# Altium PCB 20K Control Board V1.1.PcbDoc (part 17 of 24)
Units mm, origin at the board's own origin, x right, y up, seen from the top; angles counter-clockwise.
Board outline 132 x 260 mm, 4 copper layers (Top Layer, GND, VCC, Bottom Layer); 1384 components, 779 nets, 4515 pads, 1774 vias.
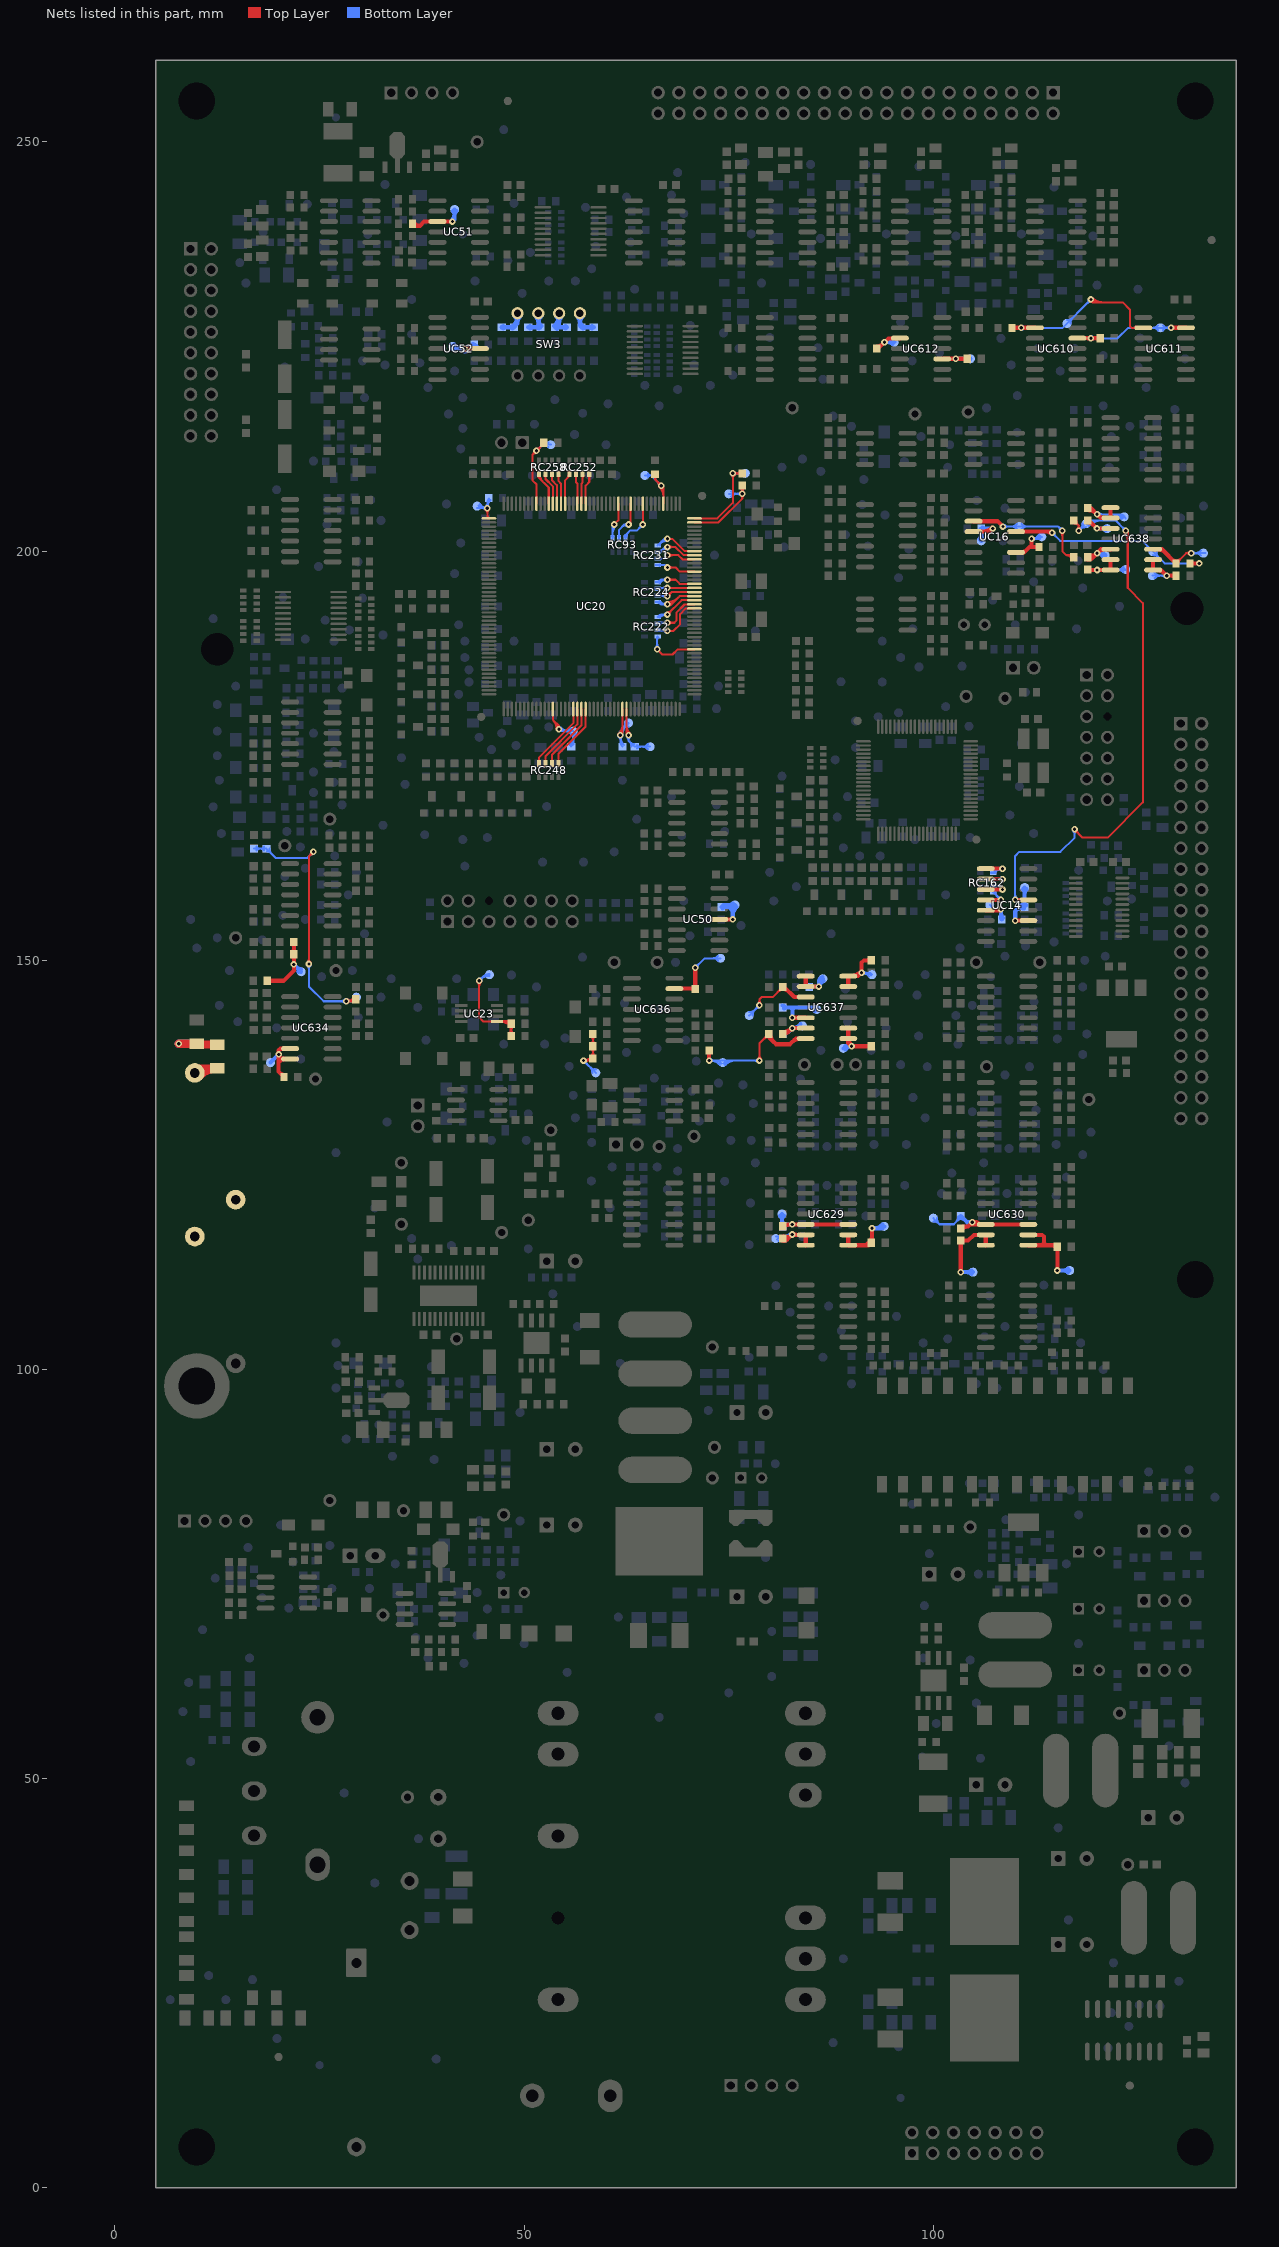
[diagram p19: the nets of this part, all layers, seen from the top]

## Via types
v1: diameter 0.8, hole 0.4, Top Layer to Bottom Layer, tented both sides, 1354 vias
v2: diameter 1.2, hole 0.7, Top Layer to Bottom Layer, 261 vias
v3: diameter 0.8, hole 0.4, Top Layer to Bottom Layer, 58 vias
v4: diameter 1.2, hole 0.7, Top Layer to Bottom Layer, tented top, 58 vias
v5: diameter 0.8, hole 0.4, Top Layer to Bottom Layer, tented top, 22 vias
v6: diameter 1.2, hole 0.7, Top Layer to Bottom Layer, tented both sides, 13 vias
v7: diameter 1.2, hole 0.7, Top Layer to Bottom Layer, tented bottom, 8 vias

## Nets (pads, with @x,y where several pads share a name; then routed paths per layer and width w, separated by ;. In a path a pad name is that pad's centre, name@x,y a point inside that pad or via, vN(x,y) a via of type N, cw(c..) or ccw(c..) an arc to the next point about the centre after c; other vN are vias at no path point) (continued)
NetRC27_1: pad.ICT@41.5,241.75 RC27.1 UC51.3 | length 9.7
  Top Layer w0.5: RC27.1@36.35,239.75 37.25,239.75 ; RC27.1@36.498,240.084 ccw(c37.25,240.762) 37.25,239.75 ; v1(41.23,240.27) UC51.3@39.4,240.27 37.77,240.27 37.25,239.75
  Bottom Layer w0.5: v1@41.124,240.376 ccw(c40.216,241.284) pad.ICT@41.5,241.284 ; v1(41.23,240.27) 41.5,240.54 pad.ICT@41.5,241.75 ; pad.ICT@41.288,241.538 cw(c40.776,241.026) 41.5,241.026 cw(c42.224,241.026) pad.ICT@41.712,241.538
NetRC28_1: pad.ICT@41.25,225 RC28.1 UC52.11 | length 9.7
  Top Layer w0.5: v1(42.75,224.75) UC52.11@44.6,224.75
  Bottom Layer w0.5: pad.ICT@41.25,225 41.5,224.75 v1(42.75,224.75) ; pad.ICT@41.462,225.212 ccw(c42.578,226.328) v1@42.578,224.75 ; v1@42.688,224.406 ccw(c42.795,225.002) 43.223,224.573 ; v1@42.777,224.898 ccw(c43.001,226.149) RC28.1@43.9,225.25 43.4,224.75 v1(42.75,224.75) ; 43.635,224.75 ccw(c43.635,225.36) RC28.1@44.157,225.045 ; RC28.1@43.729,225.303 cw(c42.75,225.892) v1(42.75,224.75)
NetRC36_1: pad.ICT@104.525,223.5 RC36.1 UC612.10 | length 6.5
  Top Layer w0.5: UC612.10@101.12,223.5 v1(102.75,223.5) RC36.1@103.9,223.5 ; RC36.1@104.009,223.359 ccw(c103.667,223.017) 103.667,223.5 ccw(c103.667,223.983) RC36.1@104.009,223.641
  Bottom Layer w0.5: v1(102.75,223.5) pad.ICT@104.525,223.5 ; pad.ICT@104.313,223.288 ccw(c103.801,222.776) 103.801,223.5 ccw(c103.801,224.224) pad.ICT@104.313,223.712
NetRC40_1: pad.ICT@95.22,225.53 RC40.1 UC612.3 | length 6.4
  Top Layer w0.5: RC40.1@93.1,224.75 93.25,224.75 94.5,226 UC612.3@95.88,226 ; RC40.1@93.1,225 ccw(c93.1,225.966) v1@93.783,225.283
  Bottom Layer w0.5: v1(94.03,225.53) pad.ICT@95.22,225.53 ; pad.ICT@95.008,225.318 ccw(c94.496,224.806) 94.496,225.53 ccw(c94.496,226.254) pad.ICT@95.008,225.742
NetRC43_2: pad.ICT@75.75,156.75 RC43.2 UC50.11 | length 15.2
  Top Layer w0.5: UC50.11@73.85,155 v1(75.48,155)
  Bottom Layer w0.5: RC43.2@74.241,156.359 cw(c74.583,156.017) 74.583,156.5 cw(c74.583,156.983) RC43.2@74.241,156.641 ; RC43.2@74.241,156.409 cw(c75.066,155.584) 75.066,156.75 ; RC43.2@74.422,156.5 ccw(c74.422,158.078) 75.538,156.962 cw(c75.026,157.474) 75.026,156.75 cw(c75.026,156.026) pad.ICT@75.538,156.538 ; 74.882,156.618 ccw(c75.392,157.127) pad.ICT@75.888,156.605 ; pad.ICT@75.464,156.84 cw(c75,156.986) 75,156.5 ; v1(75.48,155) 75.48,156.02 ; v1@75.48,155.374 cw(c77.126,155.374) pad.ICT@75.962,156.538 ; 75,156.5 75.48,156.02 ; 75,156.5 RC43.2@74.1,156.5 74.35,156.75 pad.ICT@75.75,156.75 75.48,156.48 75.48,156.02 ; 75.48,155.972 cw(c75.996,155.972) 75.841,156.464 ccw(c75.996,155.972) 75.48,155.972
NetRC60_1: pad.ICT@22.75,148.6 RC60.1 RC507.2 RC707.2 | length 12.7
  Top Layer w0.5: RC707.2@18.6,147.5 20.6,147.5 21.85,148.75 RC60.1@21.85,152.25 ; RC707.2@18.741,147.359 cw(c19.083,147.017) 19.083,147.5 cw(c19.083,147.983) RC707.2@18.741,147.641 ; RC507.2@21.709,150.559 cw(c21.367,150.217) 21.85,150.217 cw(c22.333,150.217) RC507.2@21.991,150.559 ; RC507.2@21.709,150.941 ccw(c21.367,151.283) 21.85,151.283 ccw(c22.333,151.283) RC507.2@21.991,150.941 ; RC60.1@21.709,152.059 cw(c21.367,151.717) 21.85,151.717 cw(c22.333,151.717) RC60.1@21.991,152.059
  Bottom Layer w0.5: v1(21.85,149.5) pad.ICT@22.75,148.6 ; pad.ICT@22.45,148.6 ccw(c21.726,148.6) 22.238,149.112 ccw(c22.75,149.624) pad.ICT@22.75,148.9
NetRC65_1: pad.ICT@94,117.5 RC65.1 UC629.8 UC629.9 | length 10.6
  Top Layer w0.5: UC629.9@89.6,116.46 UC629.8@89.6,115.19 92.09,115.19 RC65.1@92.4,115.5 92.5,115.6 v1(92.5,117.25) ; 91.289,115.19 ccw(c91.289,116.561) RC65.1@92.259,115.591 ; RC65.1@92.259,115.691 ccw(c91.676,116.274) 92.5,116.274
  Bottom Layer w0.5: v1(92.5,117.25) 93.75,117.25 pad.ICT@94,117.5 ; v1@92.672,117.25 ccw(c92.672,118.828) pad.ICT@93.788,117.712
NetRC68_2: pad.ICT@81.5,119 RC68.2 RC70.1 UC629.5 UC629.10 | length 14.2
  Top Layer w0.5: RC70.1@81.6,117.5 81.83,117.73 v1(82.75,117.73) UC629.5@84.4,117.73 UC629.10@89.6,117.73 ; RC70.1@81.741,117.409 cw(c82.517,116.633) v1@82.517,117.73
  Bottom Layer w0.5: pad.ICT@81.288,118.788 cw(c80.776,118.276) 81.5,118.276 cw(c82.224,118.276) pad.ICT@81.712,118.788 ; RC68.2@81.5,117.6 pad.ICT@81.5,119 ; 81.5,118.274 ccw(c82.324,118.274) RC68.2@81.741,117.691 ; RC68.2@81.6,117.5 81.83,117.73 v1(82.75,117.73) ; RC68.2@81.741,117.409 cw(c82.517,116.633) v1@82.517,117.73
NetRC72_1: pad.ICT@80.75,116 RC72.1 UC629.6 UC629.7 | length 13.7
  Top Layer w0.5: RC72.1@81.494,115.77 ccw(c81.717,116.359) 82.163,115.913 ; RC72.1@81.6,116 82.25,116 v1@82.71,116.46 ; RC72.1@81.671,116.237 ccw(c82.018,117.152) v1@82.71,116.46 ; RC72.1@81.741,115.859 cw(c82.083,115.517) 82.083,116 cw(c82.083,116.483) RC72.1@81.741,116.141 ; v1@82.856,116.606 ccw(c83.209,116.959) 83.209,116.46 ; UC629.7@84.4,115.19 UC629.6@84.4,116.46 v1@82.71,116.46
  Bottom Layer w0.25: pad.ICT@80.75,116.25 82.5,116.25 v1@82.71,116.46 ; pad.ICT@80.874,115.876 cw(c81.776,114.974) 81.776,116.25 ; pad.ICT@81.051,115.699 cw(c82.38,114.37) 82.38,116.25 ; 81.483,116.25 ccw(c81.483,117.767) v1@82.556,116.694 ; 82.086,116.25 ccw(c82.086,117.164) v1@82.732,116.518
  other v1: 82.75,116.5
NetRC79_1: pad.ICT@29.5,145.5 RC79.1 RC506.2 RC709.2 | length 45.3
  Top Layer w0.25: v1@23.506,149.744 ccw(c23.036,150.214) 23.7,150.214 ccw(c24.364,150.214) v1@23.894,149.744 ; v1(23.7,149.55) 23.7,162.7 v1(24.25,163.25) ; v1@23.975,163.25 cw(c23.311,163.25) 23.781,162.781 cw(c24.25,162.311) v1@24.25,162.975 ; v1@28.444,144.806 cw(c28.914,144.336) 28.914,145 cw(c28.914,145.664) v1@28.444,145.194 ; 28.798,145 ccw(c28.798,145.722) RC709.2@29.343,145.249 ; RC709.2@29.154,145.413 cw(c28.25,146.197) v1(28.25,145) RC709.2@29.4,145
  Bottom Layer w0.25: RC506.2@17,163.65 RC79.1@18.5,163.65 19.65,162.5 23.5,162.5 v1(24.25,163.25) ; RC506.2@17.28,163.42 cw(c17.835,162.865) 17.835,163.65 cw(c17.835,164.435) RC506.2@17.28,163.88 ; RC79.1@18.22,163.42 ccw(c17.665,162.865) 17.665,163.65 ccw(c17.665,164.435) RC79.1@18.22,163.88 ; RC79.1@18.55,163.325 cw(c18.55,162.661) 19.019,163.131 ; RC79.1@18.875,163.65 ccw(c19.78,163.65) 19.14,163.01 ; v1@23.506,149.356 cw(c23.036,148.886) 23.7,148.886 cw(c24.364,148.886) v1@23.894,149.356 ; v1(23.7,149.55) 23.7,146.8 25.5,145 v1(28.25,145) 29,145 pad.ICT@29.5,145.5 ; v1@23.975,163.25 cw(c23.311,163.25) 23.781,162.781 cw(c24.25,162.311) v1@24.25,162.975 ; v1@28.056,144.806 ccw(c27.586,144.336) 27.586,145 ccw(c27.586,145.664) v1@28.056,145.194 ; v1@28.444,144.806 cw(c28.914,144.336) 28.914,145 cw(c28.914,145.664) v1@28.444,145.194
NetRC93_1: RC93.1 UC20.148 | length 6.7
  Top Layer w0.25: v1(61,203.25) 61.5,203.75 UC20.148@61.5,205.8
  Bottom Layer w0.25: RC93.1@60.712,201.788 ccw(c60.498,202.002) 60.8,202.002 ccw(c61.102,202.002) RC93.1@60.888,201.788 ; RC93.1@60.8,201.55 60.8,203.05 v1(61,203.25) ; 60.8,202.103 cw(c62.147,202.103) v1@61.194,203.056 ; 60.8,202.707 cw(c61.543,202.707) v1@61.018,203.232
NetRC93_2: RC93.2 UC20.145 | length 7.6
  Top Layer w0.25: v1(62.75,203.25) 63,203.5 UC20.145@63,205.8
  Bottom Layer w0.25: RC93.2@61.512,201.788 ccw(c61.298,202.002) 61.6,202.002 ccw(c61.902,202.002) RC93.2@61.688,201.788 ; RC93.2@61.6,201.55 61.6,202.6 62.25,203.25 ; 62,203 cw(c62.309,202.691) v1@62.58,203.034 ; 62.199,203.199 cw(c62.484,202.913) v1@62.735,203.23 ; v1@62.518,203.103 ccw(c62.25,202.933) 62.25,203.25 ; v1@62.518,203.397 cw(c62.25,203.567) 62.25,203.25 ; v1(62.75,203.25) 62.25,203.25 ; v1@62.87,203.13 62.99,203.25 v1@63,203.25
NetRC93_3: RC93.3 UC20.142 | length 7.8
  Top Layer w0.25: v1(64.5,203.25) UC20.142@64.5,205.8
  Bottom Layer w0.25: RC93.3@62.275,201.7 cw(c62.679,201.7) 62.393,201.985 ; RC93.3@62.4,201.55 62.4,201.992 62.908,202.5 63.75,202.5 v1(64.5,203.25) ; RC93.3@62.525,201.7 cw(c63.532,201.7) 62.82,202.412 ; v1@64.225,203.25 cw(c63.561,203.25) 64.031,202.781 cw(c64.5,202.311) v1@64.5,202.975
NetRC95_1: pad.ICT@64.75,209.25 RC95.1 UC20.137 | length 12.4
  Top Layer w0.25: RC95.1@65.805,209.14 cw(c65.513,208.75) 66,208.75 ; RC95.1@66,209.4 66,208.75 ; RC95.1@66.195,209.14 ccw(c66.487,208.75) 66,208.75 ; v1@66.475,208 ccw(c65.811,208) 66.281,208.469 ccw(c66.75,208.939) v1@66.75,208.275 ; v1@66.556,207.806 cw(c65.483,206.733) 67,206.733 ; v1@66.732,207.982 cw(c66.086,207.336) 67,207.336 ; UC20.137@67,205.8 67,207.75 66,208.75
  Bottom Layer w0.25: pad.ICT@64.75,209.25 65.5,209.25 ; pad.ICT@65.115,209.032 cw(c65.5,208.801) 65.5,209.25 ; pad.ICT@65.115,209.468 ccw(c65.5,209.699) 65.5,209.25 ; v1@66.475,208 ccw(c65.811,208) 66.281,208.469 ccw(c66.75,208.939) v1@66.75,208.275 ; v1(66.75,208) 65.5,209.25
NetRC111_1: pad.ICT@104.85,111.9 RC111.1 UC630.6 UC630.7 | length 12.6
  Top Layer w0.5: RC111.1@103.209,115.559 cw(c102.867,115.217) 103.35,115.217 cw(c103.833,115.217) RC111.1@103.491,115.559 ; v1(103.35,111.9) RC111.1@103.35,115.75 104.25,115.75 104.96,116.46 UC630.6@106.4,116.46 UC630.7@106.4,115.19 ; RC111.1@103.491,115.609 cw(c103.833,115.267) 103.833,115.75 cw(c103.833,116.233) RC111.1@103.491,115.891
  Bottom Layer w0.5: v1(103.35,111.9) pad.ICT@104.85,111.9 ; pad.ICT@104.638,111.688 ccw(c104.126,111.176) 104.126,111.9 ccw(c104.126,112.624) pad.ICT@104.638,112.112
NetRC114_1: pad.ICT@77.5,143.25 RC114.1 UC637.3 | length 15
  Top Layer w0.25: v1@78.556,144.694 ccw(c78.086,145.164) 78.75,145.164 ccw(c79.414,145.164) v1@78.944,144.694 ; v1(78.75,144.5) 78.75,145.25 79,145.5 80.35,145.5 RC114.1@81.6,146.75 ; 80.96,146.11 cw(c81.6,145.47) RC114.1@81.6,146.375 ; 81.081,146.231 ccw(c80.611,146.7) RC114.1@81.275,146.7
  Top Layer w0.5: RC114.1@81.6,146.5 cw(c81.6,145.486) 82.317,146.203 ; RC114.1@81.6,146.75 81.77,146.75 83,145.52 UC637.3@84.4,145.52
  Bottom Layer w0.25: pad.ICT@77.5,143.25 v1(78.75,144.5) ; pad.ICT@77.5,143.675 ccw(c77.5,144.701) 78.226,143.976 ccw(c78.951,143.25) pad.ICT@77.925,143.25 ; v1@78.475,144.5 cw(c77.811,144.5) 78.281,144.031 cw(c78.75,143.561) v1@78.75,144.225
NetRC117_2: pad.ICT@100,118.5 RC117.2 RC122.1 UC630.5 UC630.10 | length 25.6
  Top Layer w0.5: RC122.1@103.498,117.166 cw(c104.25,116.488) 104.25,117.5 ; RC122.1@103.6,117.5 104.25,117.5 ; v1@104.48,117.73 UC630.5@106.4,117.73 ; v1@104.817,117.866 cw(c105.07,117.36) UC630.5@105.47,117.76 ; v1@104.827,118 cw(c104.827,116.957) UC630.5@105.565,117.695 ; UC630.5@105.551,117.723 ccw(c105.23,117.676) 105.23,118 ; UC630.5@106,117.73 105.5,117.73 105.23,118 ; UC630.10@111.6,117.73 UC630.5@106.4,117.73 ; 104.25,117.5 v1(104.75,118) ; v1(104.75,118) 105.23,118 ; v1(104.75,118) 105.02,117.73 UC630.5@106.4,117.73 ; v1@104.856,118.106 ccw(c105.764,119.014) 105.764,117.73 cw(c105.764,119.014) v1@104.856,118.106
  Bottom Layer w0.25: pad.ICT@100,118.075 cw(c100,117.049) 100.726,117.774 cw(c101.451,118.5) pad.ICT@100.425,118.5 ; pad.ICT@100,118.5 100.75,117.75 102.5,117.75 103.35,118.6 RC117.2@103.35,118.75 ; 102.724,117.974 ccw(c101.999,118.7) RC117.2@103.025,118.7 ; 102.966,118.216 cw(c103.35,117.832) RC117.2@103.35,118.375
  Bottom Layer w0.5: RC117.2@103.35,118.5 cw(c103.35,117.896) RC117.2@103.777,118.323 ; RC117.2@103.35,118.75 104.1,118 v1(104.75,118)
NetRC119_1: pad.ICT@86.5,147.75 RC119.1 UC637.1 UC637.2 | length 8.9
  Top Layer w0.5: UC637.1@84.4,148.06 UC637.2@84.4,146.79 v1(86,146.79)
  Bottom Layer w0.5: RC119.1@84.85,146.75 84.89,146.79 v1(86,146.79) 86,147.25 pad.ICT@86.5,147.75 ccw(c87.355,146.895) v1@86.15,146.802 ; RC119.1@84.991,146.659 cw(c85.309,146.341) 85.309,146.79 ; RC119.1@84.991,146.941 ccw(c85.357,147.307) 85.357,146.79 ; v1@86,146.668 cw(c86.832,146.668) pad.ICT@86.588,147.463 ; 86,147.344 cw(c86.625,147.344) pad.ICT@86.441,147.941
NetRC128_1: pad.ICT@116.65,112.1 RC128.1 UC630.8 UC630.9 | length 14.2
  Top Layer w0.5: UC630.8@111.6,115.19 113.25,115.19 ; UC630.9@111.6,116.46 113.29,116.46 113.5,116.25 113.5,115.44 ; 113.75,115.19 113.5,115.44 ; 114.329,115.19 cw(c114.329,114.229) RC128.1@115.009,114.909 ; RC128.1@115.009,114.809 cw(c114.667,114.467) 115.15,114.467 cw(c115.633,114.467) RC128.1@115.291,114.809 ; v1(115.15,112.1) RC128.1@115.15,115 114.96,115.19 113.25,115.19 ; 113.25,115.19 113.5,115.44
  Bottom Layer w0.5: v1(115.15,112.1) pad.ICT@116.65,112.1 ; pad.ICT@116.438,111.888 ccw(c115.926,111.376) 115.926,112.1 ccw(c115.926,112.824) pad.ICT@116.438,112.312
NetRC129_1: pad.ICT@58.75,136.25 RC129.1 RC130.2 RC511.1 | length 16.5
  Top Layer w0.25: v1@57.444,137.556 cw(c57.914,137.086) 57.914,137.75 cw(c57.914,138.414) v1@57.444,137.944 ; 57.798,137.75 ccw(c57.798,138.472) RC129.1@58.343,137.999 ; RC129.1@58.154,138.163 cw(c57.25,138.947) v1(57.25,137.75) RC129.1@58.4,137.75 ; RC129.1@58.17,138.28 ccw(c57.615,138.835) 58.4,138.835 ccw(c59.185,138.835) RC129.1@58.63,138.28 ; RC511.1@58.17,139.22 cw(c57.615,138.665) 58.4,138.665 cw(c59.185,138.665) RC511.1@58.63,139.22 ; RC511.1@58.17,139.78 ccw(c57.615,140.335) 58.4,140.335 ccw(c59.185,140.335) RC511.1@58.63,139.78 ; RC130.2@58.17,140.72 cw(c57.615,140.165) 58.4,140.165 cw(c59.185,140.165) RC130.2@58.63,140.72 ; RC129.1@58.4,138 RC511.1@58.4,139.5 RC130.2@58.4,141
  Bottom Layer w0.25: v1@57.25,137.475 cw(c57.25,136.811) 57.719,137.281 cw(c58.189,137.75) v1@57.525,137.75 ; v1(57.25,137.75) pad.ICT@58.75,136.25 ; pad.ICT@58.325,136.25 ccw(c57.299,136.25) 58.024,136.976 ccw(c58.75,137.701) pad.ICT@58.75,136.675
NetRC143_1: pad.ICT@74.25,137.5 RC143.1 RC149.1 UC637.7 | length 29.6
  Top Layer w0.25: v1@78.556,137.944 ccw(c78.086,138.414) 78.75,138.414 ccw(c79.414,138.414) v1@78.944,137.944 ; v1(78.75,137.75) 78.75,139.85 RC143.1@79.9,141 ; 79.26,140.36 cw(c79.9,139.72) RC143.1@79.9,140.625 ; 79.381,140.481 ccw(c78.911,140.95) RC143.1@79.575,140.95
  Top Layer w0.5: RC149.1@72.459,138.809 cw(c72.117,138.467) 72.6,138.467 cw(c73.083,138.467) RC149.1@72.741,138.809 ; v1(72.6,137.75) RC149.1@72.6,139 ; RC143.1@79.9,141.25 RC143.1@79.9,141 79.9,140.6 80.75,139.75 82.5,139.75 83.19,140.44 UC637.7@84.4,140.44 ; RC143.1@80.1,140.95 ccw(c81.428,140.95) 80.489,140.011 ; 82.815,140.065 cw(c83.6,139.279) UC637.7@83.6,140.39 ; 82.985,140.235 cw(c83.42,139.801) UC637.7@83.586,140.392
  Bottom Layer w0.25: v1(72.6,137.75) v1(78.75,137.75) ; v1@72.62,137.75 cw(c72.62,135.87) pad.ICT@73.949,137.199 ; v1@72.794,137.556 cw(c73.264,137.086) 73.264,137.75 cw(c73.264,138.414) v1@72.794,137.944 ; 73.224,137.75 cw(c73.224,136.474) pad.ICT@74.126,137.376 ; pad.ICT@74.374,137.376 cw(c75.276,136.474) 75.276,137.75 ; pad.ICT@74.551,137.199 cw(c75.88,135.87) 75.88,137.75 ; v1@78.556,137.556 ccw(c78.086,137.086) 78.086,137.75 ccw(c78.086,138.414) v1@78.556,137.944
NetRC143_2: pad.ICT@84,142 RC143.2 RC147.1 UC637.6 | length 10.1
  Top Layer w0.5: RC143.2@81.719,141.211 ccw(c81.962,141.538) 82.25,141.25 ; RC143.2@81.779,140.96 cw(c82.25,140.722) 82.25,141.25 ; 82.412,141.412 cw(c82.77,141.053) v1@82.77,141.56 ; v1@82.71,141.71 cw(c81.6,142.819) 81.6,141.25 82.25,141.25 ; UC637.6@84.4,141.71 v1(82.77,141.71) 82.71,141.71 82.25,141.25
  Bottom Layer w0.5: RC147.1@81.6,141.25 82.31,141.25 ; RC147.1@81.771,140.946 cw(c82.31,140.62) 82.31,141.25 ; pad.ICT@83.766,142.188 cw(c82.77,142.987) v1(82.77,141.71) ; pad.ICT@83.96,141.71 v1(82.77,141.71) ; 82.31,141.25 v1(82.77,141.71)
NetRC150_2: pad.ICT@85.75,144 RC150.2 UC637.5 | length 9.7
  Top Layer w0.5: v1(82.77,142.98) UC637.5@84.4,142.98
  Bottom Layer w0.5: RC150.2@81.6,144.5 81.85,144.25 82.5,144.25 ; RC150.2@81.741,144.109 cw(c82.083,143.767) 82.083,144.25 cw(c82.083,144.733) RC150.2@81.741,144.391 ; v1(82.77,142.98) 82.77,143.98 ; 83.04,144.25 82.77,143.98 ; 84.422,144.25 cw(c84.422,142.672) pad.ICT@85.538,143.788 ; pad.ICT@85.75,144 85.5,144.25 82.5,144.25 ; 82.5,144.25 82.77,143.98
NetRC161_1: pad.ICT@74,150.25 RC161.1 UC636.13 | length 12.9
  Top Layer w0.5: UC636.13@68.35,146.54 RC161.1@70.9,146.54 ; 70.393,146.54 ccw(c70.393,147.057) 70.759,146.691 ccw(c70.417,147.033) 70.9,147.033 ccw(c71.383,147.033) RC161.1@71.041,146.691 ; 70.441,146.54 cw(c70.441,146.091) RC161.1@70.759,146.409 ; RC161.1@70.9,146.5 RC161.1@70.9,146.54 ; v1(70.9,149.1) RC161.1@70.9,146.54
  Bottom Layer w0.25: v1(70.9,149.1) 72.05,150.25 pad.ICT@74,150.25 ; v1@70.9,149.375 ccw(c70.9,150.039) 71.369,149.569 ccw(c71.839,149.1) v1@71.175,149.1 ; pad.ICT@73.699,149.949 ccw(c72.974,149.224) 72.974,150.25 ccw(c72.974,151.276) pad.ICT@73.699,150.551
NetRC162_5: RC162.5 UC14.1 | length 7.4
  Top Layer w0.5: UC14.1@106.4,161.195 v1(108.445,161.195)
  Bottom Layer w0.25: RC162.5@107.05,160.7 RC162.5@107.3,160.7 107.45,160.7 107.945,161.195 ; RC162.5@107.45,160.825 ccw(c107.45,161.127) 107.663,160.913 ccw(c107.877,160.7) RC162.5@107.575,160.7 ; RC162.5@107.596,160.846 cw(c108.383,160.059) v1@108.444,161.17 ; RC162.5@107.695,160.945 cw(c108.004,160.636) v1@108.275,160.979 ; 107.894,161.144 cw(c108.179,160.858) v1@108.43,161.175 ; 107.992,161.242 cw(c108.424,160.809) v1@108.457,161.42 ; v1@108.213,161.048 ccw(c107.945,160.878) 107.945,161.195 ; v1@108.213,161.342 cw(c107.945,161.512) 107.945,161.195 ; v1(108.445,161.195) 107.945,161.195
NetRC162_6: RC162.6 UC14.2 | length 4.7
  Top Layer w0.5: UC14.2@106.4,159.925 v1(108.445,159.925)
  Bottom Layer w0.25: RC162.6@107.05,159.9 108.17,159.9 v1@108.195,159.925 ; RC162.6@107.538,159.812 cw(c107.752,159.598) 107.752,159.9 cw(c107.752,160.202) RC162.6@107.538,159.988 ; 107.721,159.9 ccw(c107.721,160.649) v1@108.251,160.119 ; 107.841,159.9 cw(c107.841,159.321) v1@108.251,159.731
NetRC162_7: RC162.7 UC14.3 | length 5.1
  Top Layer w0.5: UC14.3@106.4,158.655 v1(108.445,158.655)
  Bottom Layer w0.25: RC162.7@107.05,159.1 RC162.7@107.3,159.1 108,159.1 ; RC162.7@107.538,159.012 cw(c107.752,158.798) 107.752,159.1 cw(c107.752,159.402) RC162.7@107.538,159.188 ; v1@108.17,158.666 ccw(c107.588,158.688) 108,159.1 ; v1@108.434,158.93 cw(c108.412,159.512) 108,159.1 ; v1(108.445,158.655) 108,159.1
NetRC162_8: RC162.8 UC14.4 | length 4.8
  Top Layer w0.5: UC14.4@106.4,157.385 v1(108.25,157.385)
  Bottom Layer w0.25: RC162.8@107.3,158.3 107.335,158.3 v1(108.25,157.385) ; RC162.8@107.575,158.3 ccw(c108.154,158.3) 107.745,157.89 ; v1@107.975,157.385 ccw(c107.311,157.385) 107.781,157.854 ccw(c108.25,158.324) v1@108.25,157.66 ; v1@108.365,157.385 v1@108.445,157.385
NetRC164_1: pad.ICT@121.25,202.75 RC164.1 UC638.3 | length 6.1
  Top Layer w0.5: RC164.1@118.85,203.5 cw(c118.85,202.534) 119.533,203.217 ; RC164.1@118.85,203.75 119,203.75 v1(119.98,202.77) UC638.3@121.65,202.77
  Bottom Layer w0.5: v1(119.98,202.77) pad.ICT@121,202.77 ; 120.477,202.77 cw(c120.477,201.977) pad.ICT@121.038,202.538 ; 120.574,202.77 ccw(c120.574,203.426) pad.ICT@121.038,202.962
NetRC164_2: pad.ICT@118.65,203.35 RC164.2 UC14.13 | length 83.8
  Top Layer w0.25: RC164.2@117.15,203.75 117.75,203.15 ; RC164.2@117.156,203.375 cw(c117.171,202.521) 117.775,203.125 ; v1@117.25,165.725 cw(c117.25,165.122) 117.676,165.548 ; v1@117.25,165.975 118.225,165 121.296,165 125.6,169.304 125.6,193.65 123.75,195.5 123.75,202.25 v1(123.5,202.5) ; RC164.2@117.475,203.7 ccw(c118.139,203.7) 117.669,203.231 ; v1@117.525,166 ccw(c118.25,166) 117.737,165.487 ; v1@117.559,202.697 ccw(c117.119,203.15) 117.75,203.15 ; v1(117.75,202.5) 117.75,203.15 ; v1@117.941,202.697 cw(c118.381,203.15) 117.75,203.15 ; v1@123.306,202.306 cw(c122.233,201.233) 123.75,201.233 ; v1@123.482,202.482 cw(c122.836,201.836) 123.75,201.836
  Top Layer w0.5: v1(110,157.385) UC14.13@111.6,157.385
  Bottom Layer w0.25: v1@109.806,157.579 ccw(c109.336,158.049) 110,158.049 ccw(c110.664,158.049) v1@110.194,157.579 ; v1(110,157.385) 110,162.75 110.5,163.25 115.5,163.25 117.25,165 v1(117.25,166) ; v1@117.056,165.806 cw(c116.586,165.336) 117.25,165.336 cw(c117.914,165.336) v1@117.444,165.806 ; v1(117.75,202.5) 119,203.75 122.25,203.75 v1@123.25,202.75 ; v1@117.75,202.775 ccw(c117.75,203.439) 118.219,202.969 ccw(c118.689,202.5) v1@118.025,202.5 ; v1@117.839,202.589 cw(c118.65,201.778) pad.ICT@118.65,202.925 ; v1@117.96,202.71 ccw(c117.32,203.35) pad.ICT@118.225,203.35 ; pad.ICT@118.597,203.403 cw(c119.435,202.565) 119.435,203.75 ; pad.ICT@118.774,203.226 cw(c120.038,201.962) 120.038,203.75 ; pad.ICT@118.951,203.049 cw(c120.642,201.358) 120.642,203.75 ; v1@123.225,202.5 ccw(c122.561,202.5) 123.031,202.969 ccw(c123.5,203.439) v1@123.5,202.775
NetRC166_1: pad.ICT@123.309,204.191 RC166.1 UC638.1 UC638.2 | length 14.8
  Top Layer w0.5: RC166.1@118.85,205 cw(c118.85,203.431) v1@119.96,204.54 ; RC166.1@118.91,205.31 RC166.1@118.85,205.25 119.25,205.25 v1(120,204.5) 120.46,204.04 UC638.2@121.65,204.04 UC638.1@121.65,205.31 ; v1@120.195,204.305 ccw(c120.734,204.844) UC638.2@120.843,204.089
  Bottom Layer w0.25: v1(120,204.5) 123,204.5 pad.ICT@123.5,204 ; v1@120.194,204.306 cw(c120.664,203.836) 120.664,204.5 cw(c120.664,205.164) v1@120.194,204.694 ; 121.536,204.5 cw(c121.536,202.418) pad.ICT@123.009,203.89 ; 122.14,204.5 cw(c122.14,203.021) pad.ICT@123.186,204.067 ; 122.744,204.5 cw(c122.744,203.625) pad.ICT@123.362,204.244
NetRC170_2: pad.ICT@111.15,158.9 RC170.2 UC14.11 | length 11.6
  Top Layer w0.5: v1(110,154.845) UC14.11@111.6,154.845
  Bottom Layer w0.5: v1(110,154.845) 110,156 110.5,156.5 RC170.2@111.15,156.5 ; 110.175,156.175 cw(c110.72,155.63) RC170.2@111.061,156.321 ; 110.477,156.477 cw(c111.136,155.819) RC170.2@111.157,156.75 ; 110.668,156.668 cw(c111.046,156.29) RC170.2@111.283,156.769 ; pad.ICT@110.938,158.688 cw(c110.426,158.176) 111.15,158.176 cw(c111.874,158.176) pad.ICT@111.362,158.688 ; RC170.2@111.009,156.359 ccw(c110.667,156.017) 110.667,156.5 ccw(c110.667,156.983) RC170.2@111.009,156.641 ; RC170.2@111.009,156.691 ccw(c110.667,157.033) 111.15,157.033 ccw(c111.633,157.033) RC170.2@111.291,156.691 ; RC170.2@111.064,156.5 RC170.2@111.15,156.5 ; pad.ICT@111.15,158.9 RC170.2@111.15,156.5
NetRC171_1: pad.ICT@89,139.25 RC171.1 UC637.8 UC637.9 | length 8.5
  Top Layer w0.5: UC637.9@89.6,141.71 UC637.8@89.6,140.44 ; v1@90.073,139.631 cw(c90.528,140.44) UC637.8@89.6,140.44 ; RC171.1@92.259,139.359 ccw(c91.917,139.017) 91.917,139.5 ccw(c91.917,139.983) RC171.1@92.259,139.641 ; RC171.1@92.4,139.5 v1(90,139.5) 89.6,139.9 UC637.8@89.6,140.44
  Bottom Layer w0.5: pad.ICT@89,139.25 89.25,139.5 v1(90,139.5) ccw(c90,138.616) pad.ICT@89.253,139.089
NetRC173_1: pad.ICT@106.892,156.766 RC173.1 UC14.5 | length 7.1
  Top Layer w0.5: UC14.5@106.4,156.115 108.115,156.115 v1(108.25,156.25) ; 107.562,156.115 ccw(c107.562,156.938) v1@108.144,156.356
  Bottom Layer w0.25: pad.ICT@106.892,156.766 107.408,156.25 v1(108.25,156.25) ; v1@108.056,156.056 ccw(c107.586,155.586) 107.586,156.25 ccw(c107.586,156.914) v1@108.056,156.444
  Bottom Layer w0.5: 108.25,155.774 ccw(c109.074,155.774) RC173.1@108.491,155.191 ; v1(108.25,156.25) 108.25,155.1 RC173.1@108.35,155
NetRC175_1: pad.ICT@92.5,148.25 RC175.1 UC637.13 UC637.14 | length 12.9
  Top Layer w0.5: UC637.13@89.6,146.79 UC637.14@89.6,148.06 90.81,148.06 v1(91.223,148.473) 91.223,149.723 91.5,150 RC175.1@92.4,150 ; UC637.14@89.864,148.06 ccw(c89.864,149.831) v1@91.117,148.579 ; UC637.14@90.4,148.11 ccw(c90.4,149.221) v1@91.185,148.435 ; RC175.1@92.259,149.859 ccw(c91.917,149.517) 91.917,150 ccw(c91.917,150.483) RC175.1@92.259,150.141
  Bottom Layer w0.25: v1@91.417,148.278 cw(c91.887,147.809) 91.887,148.473 cw(c91.887,149.137) v1@91.417,148.667 ; 91.716,148.473 cw(c91.716,147.676) pad.ICT@92.359,148.147 ; pad.ICT@92.157,147.999 ccw(c91.223,147.315) v1(91.223,148.473) 92.277,148.473 pad.ICT@92.5,148.25
NetRC182_1: RC182.1 RC185.1 | length 5.5
  Top Layer w1: RC185.1@9.75,136.25 10.3,136.8 RC182.1@12.5,136.8 ccw(c12.5,133.85) RC185.1@10.277,135.79
NetRC182_2: pad.ICT@9.95,139.8 RC182.2 RC593.1 | length 6.7
  Top Layer w1: v1(7.8,139.8) RC593.1@10,139.8 ; RC593.1@10.1,139.7 RC182.2@12.5,139.7
  Bottom Layer w1: v1(7.8,139.8) pad.ICT@9.95,139.8
NetRC183_1: pad.5@19,137.5 RC183.1 UC634.6 UC634.7 | length 12.5
  Top Layer w0.5: 20,137.5 UC634.7@20.44,137.94 ; 20.015,139.015 cw(c20.425,138.605) UC634.6@20.586,139.162 ; 20.145,138.105 ccw(c20.466,138.426) UC634.7@20.587,137.988 ; RC183.1@20.223,136.177 ccw(c20.65,136.604) RC183.1@20.65,136 ; 20.241,137.741 cw(c20.6,137.383) UC634.7@20.6,137.89 ; RC183.1@20.65,135.75 20,136.4 v1@20,138.25 ; UC634.6@21.4,139.21 20.21,139.21 20,139 v1@20,138.25 ; v1@20,138.25 20.31,137.94 UC634.7@21.4,137.94 ; UC634.7@20.44,137.94 UC634.7@21.4,137.94 ; UC634.7@20.44,137.94 UC634.7@21.4,137.94
  Bottom Layer w0.5: pad.5@19,137.5 v1(20,138.5)
NetRC185_2: RC185.2 RC195.1
NetRC186_1: pad.ICT@121,199.5 RC186.1 UC638.5 | length 9.2
  Top Layer w0.5: RC186.1@118.75,199.017 ccw(c118.972,199.647) 119.445,199.175 ; RC186.1@118.85,199.25 119.52,199.25 v1(120.006,199.736) ; RC186.1@118.916,199.489 ccw(c119.265,200.478) v1(120.006,199.736) ; RC186.1@118.991,199.109 cw(c119.333,198.767) 119.333,199.25 cw(c119.333,199.733) RC186.1@118.991,199.391 ; v1@120.167,199.897 cw(c120.85,199.214) UC638.5@120.85,200.18 ; 120.325,200.055 cw(c120.686,199.694) UC638.5@120.835,200.182 ; UC638.5@121.65,200.23 120.5,200.23 v1(120.006,199.736)
  Bottom Layer w0.5: pad.ICT@120.749,199.335 ccw(c120.006,198.847) v1(120.006,199.736) 120.764,199.736 pad.ICT@121,199.5
NetRC186_2: pad.ICT@110.5,203 RC186.2 UC16.3 | length 23.2
  Top Layer w0.25: v1@115.556,202.306 cw(c115.086,201.836) 115.75,201.836 cw(c116.414,201.836) v1@115.944,202.306 ; v1(115.75,202.5) 115.75,200 116.25,199.5 ; 116.679,199.5 cw(c116.679,199.033) RC186.2@117.085,199.263 ; RC186.2@116.867,199.14 ccw(c116.25,198.791) 116.25,199.5 ; RC186.2@116.9,199.5 116.25,199.5
  Top Layer w0.5: UC16.3@104.9,203.655 107.845,203.655 ; 108,203.5 107.845,203.655 ; v1(108.5,203) 107.845,203.655
  Bottom Layer w0.25: v1@108.61,203.11 v1(108.5,203) 115.25,203 v1(115.75,202.5) ; v1@108.694,202.806 cw(c109.164,202.336) 109.164,203 cw(c109.164,203.664) v1@108.694,203.194 ; pad.ICT@110.199,202.699 ccw(c109.474,201.974) 109.474,203 ccw(c109.474,204.026) pad.ICT@110.199,203.301 ; pad.ICT@110.801,202.699 cw(c111.526,201.974) 111.526,203 cw(c111.526,204.026) pad.ICT@110.801,203.301 ; v1@115.475,202.5 ccw(c114.811,202.5) 115.281,202.969 ccw(c115.75,203.439) v1@115.75,202.775
NetRC187_2: pad.ICT@126.75,197 RC187.2 UC638.8 UC638.9 | length 9.9
  Top Layer w0.5: UC638.9@126.85,198.96 UC638.8@126.85,197.69 127.81,197.69 v1(128.5,197) RC187.2@129.65,197 ; UC638.8@127.65,197.64 cw(c127.65,197.133) 128.009,197.492 ; RC187.2@129.509,196.859 ccw(c129.167,196.517) 129.167,197 ccw(c129.167,197.483) RC187.2@129.509,197.141
  Bottom Layer w0.25: pad.ICT@126.75,197 v1(128.5,197) ; pad.ICT@127.051,196.699 cw(c127.776,195.974) 127.776,197 cw(c127.776,198.026) pad.ICT@127.051,197.301 ; v1@128.306,196.806 ccw(c127.836,196.336) 127.836,197 ccw(c127.836,197.664) v1@128.306,197.194
NetRC189_1: pad.ICT@123.5,197.75 RC189.1 UC638.6 UC638.7 | length 11.8
  Top Layer w0.5: RC189.1@118.66,197.69 v1(120,197.69) UC638.7@121.65,197.69 UC638.6@121.65,198.96 ; RC189.1@118.85,197.75 RC189.1@118.91,197.69 ; RC189.1@118.991,197.559 cw(c119.309,197.241) 119.309,197.69 ; RC189.1@118.991,197.841 ccw(c119.357,198.207) 119.357,197.69
  Bottom Layer w0.25: v1(120,197.69) pad.ICT@123.5,197.69 ; v1@120.194,197.496 cw(c120.664,197.026) 120.664,197.69 cw(c120.664,198.354) v1@120.194,197.884 ; 122.329,197.69 ccw(c122.329,198.921) pad.ICT@123.199,198.051 ; 122.619,197.69 cw(c122.619,196.869) pad.ICT@123.199,197.449 ; 122.933,197.69 ccw(c122.933,198.317) pad.ICT@123.376,197.874
NetRC190_1: pad.ICT@126.823,199.927 RC190.1 UC16.13 | length 31.7
  Top Layer w0.5: UC16.13@110.1,202.385 v1@114.365,202.385 ; 113.812,202.385 cw(c113.812,201.562) v1@114.394,202.144 ; RC190.1@131.35,198.5 v1(132.5,198.5) ; RC190.1@131.491,198.359 cw(c131.833,198.017) 131.833,198.5 cw(c131.833,198.983) RC190.1@131.491,198.641
  Bottom Layer w0.25: v1@114.5,201.975 cw(c114.5,201.311) 114.969,201.781 cw(c115.439,202.25) v1@114.775,202.25 ; v1(114.5,202.25) 115.5,201.25 125.5,201.25 128.25,198.5 v1(132.5,198.5) ; pad.ICT@126.398,199.927 ccw(c125.372,199.927) 126.098,200.652 ccw(c126.823,201.378) pad.ICT@126.823,200.352 ; pad.ICT@126.823,199.502 cw(c126.823,198.476) 127.549,199.201 cw(c128.274,199.927) pad.ICT@127.248,199.927 ; v1@132.306,198.306 ccw(c131.836,197.836) 131.836,198.5 ccw(c131.836,199.164) v1@132.306,198.694
NetRC190_2: pad.ICT@133,199.75 RC190.2 UC638.10 | length 13.5
  Top Layer w0.25: RC190.2@129.65,198.5 130.9,199.75 v1(131.5,199.75) ; RC190.2@129.65,198.875 ccw(c129.65,199.78) 130.29,199.14 ; RC190.2@129.975,198.55 cw(c130.639,198.55) 130.169,199.019 ; v1@131.292,199.57 ccw(c130.9,199.233) 130.9,199.75 ccw(c130.9,200.267) v1@131.292,199.93
  Top Layer w0.5: UC638.10@126.85,200.23 127.92,200.23 RC190.2@129.65,198.5 ; UC638.10@127.65,200.18 cw(c127.65,199.407) 128.196,199.954 ; RC190.2@129.223,198.927 ccw(c129.65,199.354) RC190.2@129.65,198.75
  Bottom Layer w0.25: v1(131.5,199.75) pad.ICT@133.25,199.75 ; v1@131.694,199.556 cw(c132.164,199.086) 132.164,199.75 cw(c132.164,200.414) v1@131.694,199.944 ; pad.ICT@132.699,199.449 ccw(c131.974,198.724) 131.974,199.75 ccw(c131.974,200.776) pad.ICT@132.699,200.051
NetRC193_1: pad.ICT@113.25,201.75 RC193.1 UC16.11 | length 9.5
  Top Layer w0.5: UC16.11@110.1,199.845 111.095,199.845 111.75,200.5 112,200.5 ; UC16.11@110.9,199.895 ccw(c110.9,200.487) 111.318,200.068 ; v1(112,201.5) 112,200.5 ; RC193.1@112.759,200.359 ccw(c112.417,200.017) 112.417,200.5 ccw(c112.417,200.983) RC193.1@112.759,200.641 ; RC193.1@112.9,200.5 112,200.5
  Bottom Layer w0.25: v1@112.194,201.306 cw(c112.664,200.836) 112.664,201.5 cw(c112.664,202.164) v1@112.194,201.694 ; 112.463,201.5 ccw(c112.463,202.266) pad.ICT@113.104,201.846 ; pad.ICT@112.895,201.983 cw(c112,202.57) v1(112,201.5) 113,201.5 pad.ICT@113.25,201.75
NetRC194_1: pad.ICT@105.85,201.25 RC194.1 UC16.4 | length 9.3
  Top Layer w0.5: UC16.4@104.9,202.385 106.885,202.385 v1(107.25,202.75) ; 106.007,202.385 ccw(c106.007,203.993) v1@107.144,202.856
  Bottom Layer w0.5: pad.ICT@105.638,201.462 ccw(c105.126,201.974) 105.85,201.974 ccw(c106.574,201.974) pad.ICT@106.062,201.462 ; RC194.1@105.709,202.559 cw(c105.367,202.217) 105.85,202.217 cw(c106.333,202.217) RC194.1@105.991,202.559 ; pad.ICT@105.85,201.25 RC194.1@105.85,202.75 v1(107.25,202.75) ; RC194.1@105.991,202.609 cw(c106.333,202.267) 106.333,202.75 cw(c106.333,203.233) RC194.1@105.991,202.891
NetRC217_2: pad.ICT@44.25,205.5 RC217.2 UC20.1 | length 10.9
  Top Layer w0.25: v1@45.306,205.056 cw(c44.836,204.586) 45.5,204.586 cw(c46.164,204.586) v1@45.694,205.056 ; UC20.1@45.5,204 v1(45.5,205.25) ; 45.5,204.543 ccw(c46.243,204.543) UC20.1@45.718,204.018
  Bottom Layer w0.25: pad.ICT@44.25,205.25 v1(45.5,205.25) ; pad.ICT@44.396,205.596 ccw(c45.037,206.016) 45.037,205.25 ; pad.ICT@44.605,205.733 ccw(c45.5,206.32) v1(45.5,205.25) ; v1@45.306,205.056 ccw(c44.836,204.586) 44.836,205.25 ccw(c44.836,205.914) 45.306,205.444 ccw(c44.836,205.914) 45.5,205.914 ccw(c46.164,205.914) v1@45.694,205.444 ; v1@45.5,205 v1(45.5,205.25) ; v1@45.5,205.303 cw(c46.797,205.303) RC217.2@45.88,206.22 ; 45.5,205.907 cw(c46.193,205.907) RC217.2@45.703,206.397 ; RC217.2@45.65,206.25 45.5,206.1 v1(45.5,205.25)
NetRC222_1: RC222.1 UC20.112 | length 9
  Top Layer w0.25: v1(67.5,192.25) 69.25,194 UC20.112@70.8,194 ; v1@67.5,192.525 ccw(c67.5,193.189) 67.969,192.719 ccw(c68.439,192.25) v1@67.775,192.25
  Bottom Layer w0.25: RC222.1@66.3,191.95 66.45,191.95 66.75,192.25 v1(67.5,192.25) ; RC222.1@66.362,192.038 cw(c66.872,191.528) 66.872,192.25 ; RC222.1@66.538,191.862 cw(c67.476,190.924) v1@67.476,192.25 ; v1@67.306,192.056 ccw(c66.836,191.586) 66.836,192.25 ccw(c66.836,192.914) v1@67.306,192.444
NetRC222_2: RC222.2 UC20.111 | length 8.5
  Top Layer w0.25: v1(67.5,191.25) 68.35,191.25 68.6,191.5 68.6,192.486 69.589,193.475 70.775,193.475 UC20.111@70.8,193.5 UC20.111@70.775,193.5 ; v1@67.694,191.056 cw(c68.164,190.586) 68.164,191.25 cw(c68.164,191.914) v1@67.694,191.444
  Bottom Layer w0.25: RC222.2@66.4,191.25 v1(67.5,191.25) ; RC222.2@66.538,191.062 cw(c66.993,190.607) 66.993,191.25 ; v1@67.306,191.056 ccw(c66.836,190.586) 66.836,191.25 ccw(c66.836,191.914) v1@67.306,191.444
NetRC222_3: RC222.3 UC20.110 | length 8.7
  Top Layer w0.25: v1(67.5,190.25) 68.25,190.25 69.05,191.05 69.05,192.3 69.75,193 UC20.110@70.8,193 UC20.110@69.912,193
  Bottom Layer w0.25: RC222.3@66.4,190.25 v1(67.5,190.25) ; RC222.3@66.538,190.438 ccw(c66.993,190.893) 66.993,190.25 ; v1@67.306,190.056 ccw(c66.836,189.586) 66.836,190.25 ccw(c66.836,190.914) v1@67.306,190.444
NetRC222_4: RC222.4 UC20.100 | length 8.1
  Top Layer w0.25: v1(66.25,188) 66.88,187.37 68.12,187.37 68.75,188 UC20.100@70.8,188
  Bottom Layer w0.25: v1@66.056,188.194 ccw(c65.586,188.664) 66.25,188.664 ccw(c66.914,188.664) v1@66.444,188.194 ; v1(66.25,188) 66.25,189.5 RC222.4@66.3,189.55 RC222.4@66.325,189.525 ; 66.25,189.128 cw(c66.722,189.128) RC222.4@66.388,189.462
NetRC224_1: RC224.1 UC20.116 | length 8.8
  Top Layer w0.25: v1(67.5,196.5) 68.5,196.5 69,196 UC20.116@70.8,196 ; v1@67.694,196.306 cw(c68.164,195.836) 68.164,196.5 cw(c68.164,197.164) v1@67.694,196.694
  Bottom Layer w0.25: RC224.1@66.05,196.2 RC224.1@66.2,196.2 ; RC224.1@66.25,196.25 RC224.1@66.2,196.2 ; RC224.1@66.362,196.288 cw(c66.872,195.778) 66.872,196.5 ; RC224.1@66.538,196.112 cw(c67.476,195.174) v1@67.476,196.5 ; v1@67.306,196.306 ccw(c66.836,195.836) 66.836,196.5 ccw(c66.836,197.164) v1@67.306,196.694 ; v1(67.5,196.5) 66.75,196.5 66.45,196.2 RC224.1@66.3,196.2 RC224.1@66.2,196.2
NetRC224_2: RC224.2 UC20.115 | length 6.3
  Top Layer w0.25: v1(67.5,195.5) UC20.115@70.8,195.5
  Bottom Layer w0.25: RC224.2@66.05,195.4 66.15,195.5 v1(67.5,195.5) ; RC224.2@66.538,195.312 cw(c66.993,194.857) 66.993,195.5 ; v1@67.306,195.306 ccw(c66.836,194.836) 66.836,195.5 ccw(c66.836,196.164) v1@67.306,195.694
NetRC224_3: RC224.3 UC20.114 | length 7.4
  Top Layer w0.25: v1(67.5,194.5) 67.525,194.5 68.025,195 UC20.114@70.8,195 ; v1@67.5,194.775 ccw(c67.5,195.5) 68.013,194.987 ; v1@67.775,194.5 cw(c68.378,194.5) 67.952,194.926
  Bottom Layer w0.25: RC224.3@66.05,194.6 RC224.3@66.15,194.5 ; RC224.3@66.3,194.5 v1(67.5,194.5) ; RC224.3@66.538,194.688 ccw(c66.993,195.143) 66.993,194.5 ; v1@67.306,194.306 ccw(c66.836,193.836) 66.836,194.5 ccw(c66.836,195.164) v1@67.306,194.694
NetRC224_4: RC224.4 UC20.113 | length 11.6
  Top Layer w0.25: v1@67.5,193.275 ccw(c67.5,193.939) 67.969,193.469 ; v1(67.5,193.5) 68,193.5 ; v1@67.5,193.525 ccw(c67.5,194.792) 68.396,193.896 ; v1@67.5,193.775 ccw(c67.5,195.646) 68.823,194.323 ; v1@67.732,193.353 cw(c68,193.183) 68,193.5 ; v1@67.732,193.647 ccw(c68,193.817) 68,193.5 ; UC20.113@70.8,194.5 69,194.5 68,193.5
  Bottom Layer w0.25: RC224.4@66.05,193.8 66.075,193.775 RC224.4@66.325,193.775 ; RC224.4@66.3,193.8 RC224.4@66.325,193.775 ; RC224.4@66.362,193.712 ccw(c66.872,194.222) 66.872,193.5 ; RC224.4@66.5,193.75 66.75,193.5 v1(67.5,193.5) ; RC224.4@66.5,193.775 RC224.4@66.325,193.775 ; RC224.4@66.538,193.888 ccw(c67.476,194.826) v1@67.476,193.5 ; v1@67.306,193.306 ccw(c66.836,192.836) 66.836,193.5 ccw(c66.836,194.164) v1@67.306,193.694
NetRC231_1: RC231.1 UC20.124 | length 8.1
  Top Layer w0.25: v1(67.5,201.5) 68.114,201.5 69.614,200 UC20.124@70.8,200
  Bottom Layer w0.25: RC231.1@66.3,200.7 67.1,201.5 v1(67.5,201.5) ; RC231.1@66.348,200.748 cw(c67.5,199.595) v1@67.5,201.225 ; RC231.1@66.575,200.7 cw(c67.239,200.7) 66.769,201.169 ; 66.774,201.174 cw(c67.5,200.449) v1@67.5,201.475
NetRC231_2: RC231.2 UC20.123 | length 8.3
  Top Layer w0.25: v1(67.5,200.5) 68.477,200.5 69.477,199.5 UC20.123@70.8,199.5 ; v1@67.694,200.306 cw(c68.164,199.836) 68.164,200.5 cw(c68.164,201.164) v1@67.694,200.694
  Bottom Layer w0.25: RC231.2@66.3,199.9 66.65,199.9 67.25,200.5 v1(67.5,200.5) ; RC231.2@66.45,200.025 ccw(c66.45,200.81) 67.005,200.255 ; RC231.2@66.604,199.854 cw(c67.5,198.958) v1@67.5,200.225 ; 67.031,200.281 cw(c67.5,199.811) v1@67.5,200.475
NetRC231_3: RC231.3 UC20.122 | length 6.6
  Top Layer w0.25: v1(67.5,199.5) 68.841,199.5 69.341,199 UC20.122@70.8,199 ; v1@67.694,199.306 cw(c68.164,198.836) 68.164,199.5 cw(c68.164,200.164) v1@67.694,199.694
  Bottom Layer w0.25: RC231.3@66.05,199.1 RC231.3@66.3,199.1 67.1,199.1 v1(67.5,199.5) ; RC231.3@66.538,199.012 cw(c66.752,198.798) 66.752,199.1 cw(c66.752,199.402) RC231.3@66.538,199.188
NetRC231_4: RC231.4 UC20.119 | length 6.6
  Top Layer w0.25: v1(67.5,198) 68.5,198 69,197.5 UC20.119@70.8,197.5 ; v1@67.694,197.806 cw(c68.164,197.336) 68.164,198 cw(c68.164,198.664) v1@67.694,198.194
  Bottom Layer w0.25: RC231.4@66.05,198.3 RC231.4@66.3,198.3 67.2,198.3 v1(67.5,198) ; RC231.4@66.538,198.212 cw(c66.752,197.998) 66.752,198.3 cw(c66.752,198.602) RC231.4@66.538,198.388
NetRC236_1: pad.ICT@75,207 RC236.1 UC20.131 | length 16.1
  Top Layer w0.25: UC20.131@70.8,203.5 73.727,203.5 76.65,206.423 ; RC236.1@76.42,207.72 cw(c75.865,207.165) 76.65,207.165 cw(c77.435,207.165) RC236.1@76.88,207.72 ; v1@76.456,207.194 ccw(c75.986,207.664) 76.65,207.664 ccw(c77.314,207.664) v1@76.844,207.194 ; v1@76.477,206.786 cw(c76.182,206.423) 76.65,206.423 ; RC236.1@76.65,208 v1(76.65,207) 76.65,206.423 ; v1@76.823,206.786 ccw(c77.118,206.423) 76.65,206.423
  Bottom Layer w0.25: pad.ICT@75,207 v1(76.65,207) ; pad.ICT@75.301,206.699 cw(c76.026,205.974) 76.026,207 cw(c76.026,208.026) pad.ICT@75.301,207.301 ; v1@76.456,206.806 ccw(c75.986,206.336) 75.986,207 ccw(c75.986,207.664) v1@76.456,207.194
NetRC237_1: pad.ICT@77.025,209.5 RC237.1 UC20.132 | length 17.7
  Top Layer w0.25: UC20.132@70.8,204 73.591,204 75.5,205.909 v1(75.5,209.5) RC237.1@76.65,209.5 ; v1@75.306,209.306 cw(c74.836,208.836) 75.5,208.836 cw(c76.164,208.836) 75.694,209.306 cw(c76.164,208.836) 76.164,209.5 cw(c76.164,210.164) v1@75.694,209.694 ; RC237.1@76.42,209.27 ccw(c75.865,208.715) 75.865,209.5 ccw(c75.865,210.285) RC237.1@76.42,209.73
  Bottom Layer w0.25: v1(75.5,209.5) pad.ICT@77,209.5 ; v1@75.694,209.306 cw(c76.164,208.836) 76.164,209.5 cw(c76.164,210.164) v1@75.694,209.694 ; pad.ICT@76.724,209.199 ccw(c75.999,208.474) 75.999,209.5 ccw(c75.999,210.526) pad.ICT@76.724,209.801
NetRC247_2: pad.ICT@56,178 RC247.2 UC20.57 | length 14.9
  Top Layer w0.25: UC20.57@53.5,180.7 53.5,179.386 v1@54.25,178.636 ; 53.507,179.379 cw(c52.378,178.25) v1@53.975,178.25 ; 53.934,178.952 cw(c53.232,178.25) v1@54.225,178.25
  Bottom Layer w0.25: v1(54.25,178.25) 54.5,178 pad.ICT@56,178 RC247.2@56,176.35 ; v1@54.268,178.268 ccw(c54.914,178.914) 54.914,178 ; v1@54.444,178.444 ccw(c55.517,179.517) pad.ICT@55.517,178 ; RC247.2@55.57,176.33 ccw(c54.533,177.367) 56,177.367 ; pad.ICT@55.699,178.301 cw(c54.974,179.026) 54.974,178 cw(c54.974,176.974) 55.699,177.699 cw(c54.974,176.974) 56,176.974 cw(c57.026,176.974) pad.ICT@56.301,177.699 ; RC247.2@55.747,176.153 ccw(c55.136,176.764) 56,176.764
NetRC248_5: RC248.5 UC20.65 | length 8.5
  Top Layer w0.25: RC248.5@54.112,174.288 ccw(c53.898,174.502) 54.2,174.502 ccw(c54.502,174.502) RC248.5@54.288,174.288 ; RC248.5@54.2,174.05 54.2,175.266 57.5,178.566 UC20.65@57.5,180.7
NetRC248_6: RC248.6 UC20.64 | length 8.6
  Top Layer w0.25: RC248.6@53.312,174.288 ccw(c53.098,174.502) 53.4,174.502 ccw(c53.702,174.502) RC248.6@53.488,174.288 ; RC248.6@53.4,174.05 53.4,175.102 57,178.702 UC20.64@57,180.7
NetRC248_7: RC248.7 UC20.63 | length 8.7
  Top Layer w0.25: RC248.7@52.512,174.288 ccw(c52.298,174.502) 52.6,174.502 ccw(c52.902,174.502) RC248.7@52.688,174.288 ; RC248.7@52.6,174.05 52.6,174.938 56.5,178.838 UC20.63@56.5,180.7
NetRC248_8: RC248.8 UC20.62 | length 8.9
  Top Layer w0.25: RC248.8@51.712,174.288 ccw(c51.498,174.502) 51.8,174.502 ccw(c52.102,174.502) RC248.8@51.888,174.288 ; RC248.8@51.8,174.05 51.8,174.775 56,178.975 UC20.62@56,180.7
NetRC252_1: RC252.1 UC20.161 | length 5
  Top Layer w0.25: UC20.161@55,205.8 55,207.75 ; 55,208.4 55,207.75 ; 55.266,208.916 ccw(c54.882,209.3) RC252.1@55.425,209.3 ; RC252.1@55.55,209.45 55.55,209.2 55,208.65 55,207.75
NetRC252_2: RC252.2 UC20.158 | length 4.2
  Top Layer w0.25: RC252.2@56.262,209.212 cw(c56.048,208.998) 56.35,208.998 cw(c56.652,208.998) RC252.2@56.438,209.212 ; RC252.2@56.35,209.45 56.35,208.4 56.5,208.25 UC20.158@56.5,205.8
NetRC252_3: RC252.3 UC20.157 | length 4.2
  Top Layer w0.25: UC20.157@57,205.8 57,208.25 57.15,208.4 RC252.3@57.15,209.45 ; RC252.3@57.062,209.212 cw(c56.848,208.998) 57.15,208.998 cw(c57.452,208.998) RC252.3@57.238,209.212
NetRC252_4: RC252.4 UC20.156 | length 4.3
  Top Layer w0.25: UC20.156@57.5,205.8 57.5,208 57.95,208.45 RC252.4@57.95,209.45 ; RC252.4@57.862,209.212 cw(c57.648,208.998) 57.95,208.998 cw(c58.252,208.998) RC252.4@58.038,209.212
NetRC257_2: pad.ICT@62.75,179 RC257.2 UC20.74 | length 16.1
  Top Layer w0.25: v1@61.556,177.694 ccw(c60.483,178.767) 62,178.767 ; v1@61.732,177.518 ccw(c61.086,178.164) 62,178.164 ; v1(61.75,177.5) 62,177.75 UC20.74@62,180.7
  Bottom Layer w0.25: v1@61.525,177.5 cw(c62.189,177.5) 61.719,177.969 ; v1@61.556,177.306 cw(c61.086,176.836) 61.75,176.836 cw(c62.414,176.836) v1@61.944,177.306 ; v1@61.603,177.732 ccw(c61.433,178) 61.75,178 ; 61.75,176.6 v1(61.75,177.5) 61.75,178 ; 61.75,176.764 ccw(c62.614,176.764) RC257.2@62.003,176.153 ; v1@61.75,177.367 ccw(c63.217,177.367) RC257.2@62.18,176.33 ; v1@61.775,177.5 cw(c63.042,177.5) 62.146,178.396 ; v1@61.897,177.732 cw(c62.067,178) 61.75,178 ; v1@62.025,177.5 cw(c63.896,177.5) pad.ICT@62.573,178.823 ; pad.ICT@62.325,179 cw(c61.299,179) 62.024,178.274 cw(c62.75,177.549) pad.ICT@62.75,178.575 ; pad.ICT@62.75,179 61.75,178
NetRC258_1: RC258.1 UC20.165 | length 6.3
  Top Layer w0.25: RC258.1@51.675,209.3 ccw(c52.157,209.3) 51.816,208.959 ; RC258.1@51.8,209.45 51.8,208.975 53,207.775 UC20.165@53,205.8 ; RC258.1@51.925,209.3 ccw(c53.011,209.3) 52.243,208.532 ; 51.8,208.998 ccw(c51.498,208.998) 51.712,209.212 cw(c51.498,208.998) 51.8,208.998 ; 51.8,208.998 cw(c52.102,208.998) 51.888,209.212 ccw(c52.102,208.998) 51.8,208.998
NetRC258_2: RC258.2 UC20.164 | length 4.5
  Top Layer w0.25: RC258.2@52.512,209.212 cw(c52.298,208.998) 52.6,208.998 cw(c52.902,208.998) RC258.2@52.688,209.212 ; RC258.2@52.6,209.45 52.6,208.812 53.5,207.912 UC20.164@53.5,205.8
NetRC258_3: RC258.3 UC20.163 | length 4.4
  Top Layer w0.25: RC258.3@53.312,209.212 cw(c53.098,208.998) 53.4,208.998 cw(c53.702,208.998) RC258.3@53.488,209.212 ; RC258.3@53.4,209.45 53.4,208.648 54,208.048 UC20.163@54,205.8
NetRC258_4: RC258.4 UC20.162 | length 4.2
  Top Layer w0.25: RC258.4@54.112,209.212 cw(c53.898,208.998) 54.2,208.998 cw(c54.502,208.998) RC258.4@54.288,209.212 ; RC258.4@54.2,209.45 54.2,208.55 54.5,208.25 UC20.162@54.5,205.8
NetRC259_2: pad.ICT@65.4,176.1 RC259.2 UC20.75 | length 13.9
  Top Layer w0.25: 62.5,178.164 ccw(c63.414,178.164) v1@62.768,177.518 ; 62.5,178.767 ccw(c64.017,178.767) v1@62.944,177.694 ; UC20.75@62.5,180.7 62.5,177.75 v1(62.75,177.5)
  Bottom Layer w0.25: v1@62.559,177.303 cw(c62.119,176.85) 62.75,176.85 ; v1(62.75,177.5) 62.75,176.85 ; 62.86,176.74 cw(c62.22,176.1) RC259.2@63.125,176.1 ; v1@62.941,177.303 ccw(c63.381,176.85) 62.75,176.85 ; 62.981,176.619 ccw(c63.45,177.089) RC259.2@63.45,176.425 ; RC259.2@63.78,175.87 cw(c64.335,175.315) 64.335,176.1 cw(c64.335,176.885) RC259.2@63.78,176.33 ; pad.ICT@65.099,175.799 ccw(c64.374,175.074) 64.374,176.1 ccw(c64.374,177.126) pad.ICT@65.099,176.401 ; pad.ICT@65.4,176.1 RC259.2@63.5,176.1 62.75,176.85
NetRC262_1: pad.ICT@53.25,213 RC262.1 UC20.168 | length 16.2
  Top Layer w0.25: v1@51.225,212.25 cw(c50.561,212.25) 51.031,211.781 cw(c51.5,211.311) v1@51.5,211.975 ; UC20.168@51.5,205.8 51.5,208.15 51,208.65 51,211.75 RC262.1@52.45,213.2 ; v1@51.5,212.525 ccw(c51.5,213.189) 51.969,212.719 ccw(c52.439,212.25) v1@51.775,212.25 ; 51.81,212.56 ccw(c51.17,213.2) RC262.1@52.075,213.2 ; 51.931,212.681 cw(c52.4,212.211) RC262.1@52.4,212.875
  Bottom Layer w0.25: v1(51.5,212.25) 52.25,213 ; v1@51.5,212.525 ccw(c51.5,213.189) 51.969,212.719 ccw(c52.439,212.25) v1@51.775,212.25 ; pad.ICT@52.944,212.705 ccw(c52.25,212.036) 52.25,213 ; pad.ICT@52.944,213.295 cw(c52.25,213.964) 52.25,213 ; pad.ICT@53.25,213 52.25,213
NetRC276_1: RC276.1 RC281.1 SW3.5 | length 7.5
  Bottom Layer w0.5: SW3.5@56.456,228.706 cw(c55.603,227.853) 56.81,227.853 cw(c58.017,227.853) SW3.5@57.164,228.706 ; 56.81,228.171 ccw(c57.771,228.171) RC281.1@57.091,227.491 ; SW3.5@56.81,229.06 56.81,227.54 RC281.1@57,227.35 RC276.1@58.5,227.35 ; RC281.1@57.191,227.209 cw(c57.533,226.867) 57.533,227.35 cw(c57.533,227.833) RC281.1@57.191,227.491 ; RC276.1@58.309,227.209 ccw(c57.967,226.867) 57.967,227.35 ccw(c57.967,227.833) RC276.1@58.309,227.491
NetRC277_1: RC277.1 RC282.1 SW3.6 | length 8.9
  Bottom Layer w0.5: RC282.1@53.659,227.491 ccw(c52.182,228.968) SW3.6@54.27,228.968 ; RC282.1@53.75,227.35 RC277.1@55.25,227.35 ; SW3.6@53.916,228.706 cw(c53.063,227.853) 54.27,227.853 cw(c55.477,227.853) SW3.6@54.624,228.706 ; RC282.1@53.941,227.209 cw(c54.283,226.867) 54.283,227.35 cw(c54.283,227.833) RC282.1@53.941,227.491 ; RC282.1@54.012,227.138 ccw(c53.39,227.76) 54.27,227.76 ; 54.27,227.37 SW3.6@54.27,229.06 ; RC277.1@55.059,227.209 ccw(c54.717,226.867) 54.717,227.35 ccw(c54.717,227.833) RC277.1@55.059,227.491
NetRC278_1: RC278.1 RC285.1 SW3.7 | length 7.3
  Bottom Layer w0.5: RC285.1@50.5,227.35 RC278.1@52,227.35 ; RC285.1@50.691,227.209 cw(c51.033,226.867) 51.033,227.35 cw(c51.033,227.833) RC285.1@50.691,227.491 ; SW3.7@51.376,228.706 cw(c50.523,227.853) 51.73,227.853 cw(c52.937,227.853) SW3.7@52.084,228.706 ; RC278.1@51.73,227.62 SW3.7@51.73,229.06 ; SW3.7@51.73,228.364 ccw(c52.964,228.364) RC278.1@52.091,227.491 ; RC278.1@51.809,227.209 ccw(c51.467,226.867) 51.467,227.35 ccw(c51.467,227.833) RC278.1@51.809,227.491
NetRC279_1: RC279.1 RC286.1 SW3.8 | length 8.2
  Bottom Layer w0.5: RC286.1@47.25,227.35 RC279.1@48.75,227.35 49.19,227.79 SW3.8@49.19,229.06 ; RC286.1@47.441,227.209 cw(c47.783,226.867) 47.783,227.35 cw(c47.783,227.833) RC286.1@47.441,227.491 ; RC279.1@48.559,227.209 ccw(c48.217,226.867) 48.217,227.35 ccw(c48.217,227.833) RC279.1@48.559,227.491 ; RC279.1@48.659,227.491 ccw(c47.376,228.774) SW3.8@49.19,228.774 ; SW3.8@48.836,228.706 cw(c47.983,227.853) 49.19,227.853 cw(c50.397,227.853) SW3.8@49.544,228.706
NetRC284_2: pad.ICT@45.75,148.25 RC284.2 RC288.2 UC23.5 | length 18.8
  Top Layer w0.25: v1@44.306,147.306 cw(c43.836,146.836) 44.5,146.836 cw(c45.164,146.836) v1@44.694,147.306 ; v1(44.5,147.5) 44.5,143.025 45,142.525 UC23.5@46.677,142.525
  Top Layer w0.4: UC23.5@46.677,142.525 48.125,142.525 RC288.2@48.4,142.25 RC284.2@48.4,140.75 ; UC23.5@47.253,142.525 cw(c47.253,141.153) RC288.2@48.223,142.123 ; RC284.2@48.223,140.977 ccw(c47.796,141.404) 48.4,141.404 ccw(c49.004,141.404) RC284.2@48.577,140.977 ; RC288.2@48.223,142.023 cw(c47.796,141.596) 48.4,141.596 cw(c49.004,141.596) RC288.2@48.577,142.023
  Bottom Layer w0.25: v1(44.5,147.5) 45.25,148.25 pad.ICT@45.75,148.25 ; v1@44.5,147.775 ccw(c44.5,148.439) 44.969,147.969 ccw(c45.439,147.5) v1@44.775,147.5 ; v1@44.651,147.651 cw(c45.678,146.625) pad.ICT@45.742,148.075 ; 45.053,148.053 cw(c45.712,147.394) pad.ICT@45.753,148.325
NetRC293_1: pad.ICT@116.322,227.822 RC293.1 UC610.2 UC611.2 | length 29.8
  Top Layer w0.25: v1@119.091,230.591 ccw(c119.552,231.052) 119.552,230.4 ; v1(119.25,230.75) 119.6,230.4 123.123,230.4 124,229.523 124,227.5 124.21,227.29 UC611.2@125.65,227.29 ; v1@119.268,230.768 ccw(c120.155,231.655) 120.155,230.4 ; v1@119.444,230.944 ccw(c120.759,232.259) 120.759,230.4 ; UC611.2@124.726,227.166 ccw(c124.428,226.868) 124.428,227.29 ccw(c124.428,227.712) UC611.2@124.726,227.414
  Top Layer w0.5: RC293.1@109.64,227.29 v1(110.75,227.29) UC610.2@112.4,227.29 ; RC293.1@109.741,227.159 cw(c110.059,226.841) 110.059,227.29 ; RC293.1@109.741,227.441 ccw(c110.107,227.807) 110.107,227.29
  Bottom Layer w0.25: v1(110.75,227.29) 115.79,227.29 v1(119.25,230.75) ; v1@110.944,227.096 cw(c111.414,226.626) 111.414,227.29 cw(c111.414,227.954) v1@110.944,227.484 ; pad.ICT@116.322,228.247 ccw(c116.322,229.273) 117.047,228.547 ccw(c117.773,227.822) pad.ICT@116.747,227.822 ; v1@118.975,230.75 cw(c118.311,230.75) 118.781,230.281 cw(c119.25,229.811) v1@119.25,230.475
NetRC301_1: pad.ICT@127.75,227.29 RC301.1 UC610.12 UC611.13 | length 21.1
  Top Layer w0.5: UC610.12@117.6,226.02 RC301.1@120.13,226.02 ; 118.84,226.02 cw(c118.84,225.59) v1@119.144,225.894 ; v1@119.356,225.894 cw(c119.66,225.59) 119.66,226.02 ; 119.869,226.02 cw(c119.869,225.469) RC301.1@120.259,225.859 ; v1(129.04,227.29) UC611.13@130.85,227.29
  Bottom Layer w0.25: v1(119.25,226) 122.5,226 123.79,227.29 v1(129.04,227.29) ; v1@119.444,225.806 cw(c119.914,225.336) 119.914,226 cw(c119.914,226.664) v1@119.444,226.194 ; pad.ICT@127.449,226.989 ccw(c126.724,226.264) 126.724,227.29 ccw(c126.724,228.316) pad.ICT@127.449,227.591 ; pad.ICT@128.051,226.989 cw(c128.776,226.264) 128.776,227.29 cw(c128.776,228.316) pad.ICT@128.051,227.591 ; v1@128.846,227.096 ccw(c128.376,226.626) 128.376,227.29 ccw(c128.376,227.954) v1@128.846,227.484